# Altium PCB PCB1.PcbDoc
Units mil, origin at the board's own origin, x right, y up, seen from the top; angles counter-clockwise.
Board outline 1180 x 2215 mil, 2 copper layers (Top Layer, Bottom Layer); 40 components, 48 nets, 175 pads, 53 vias.
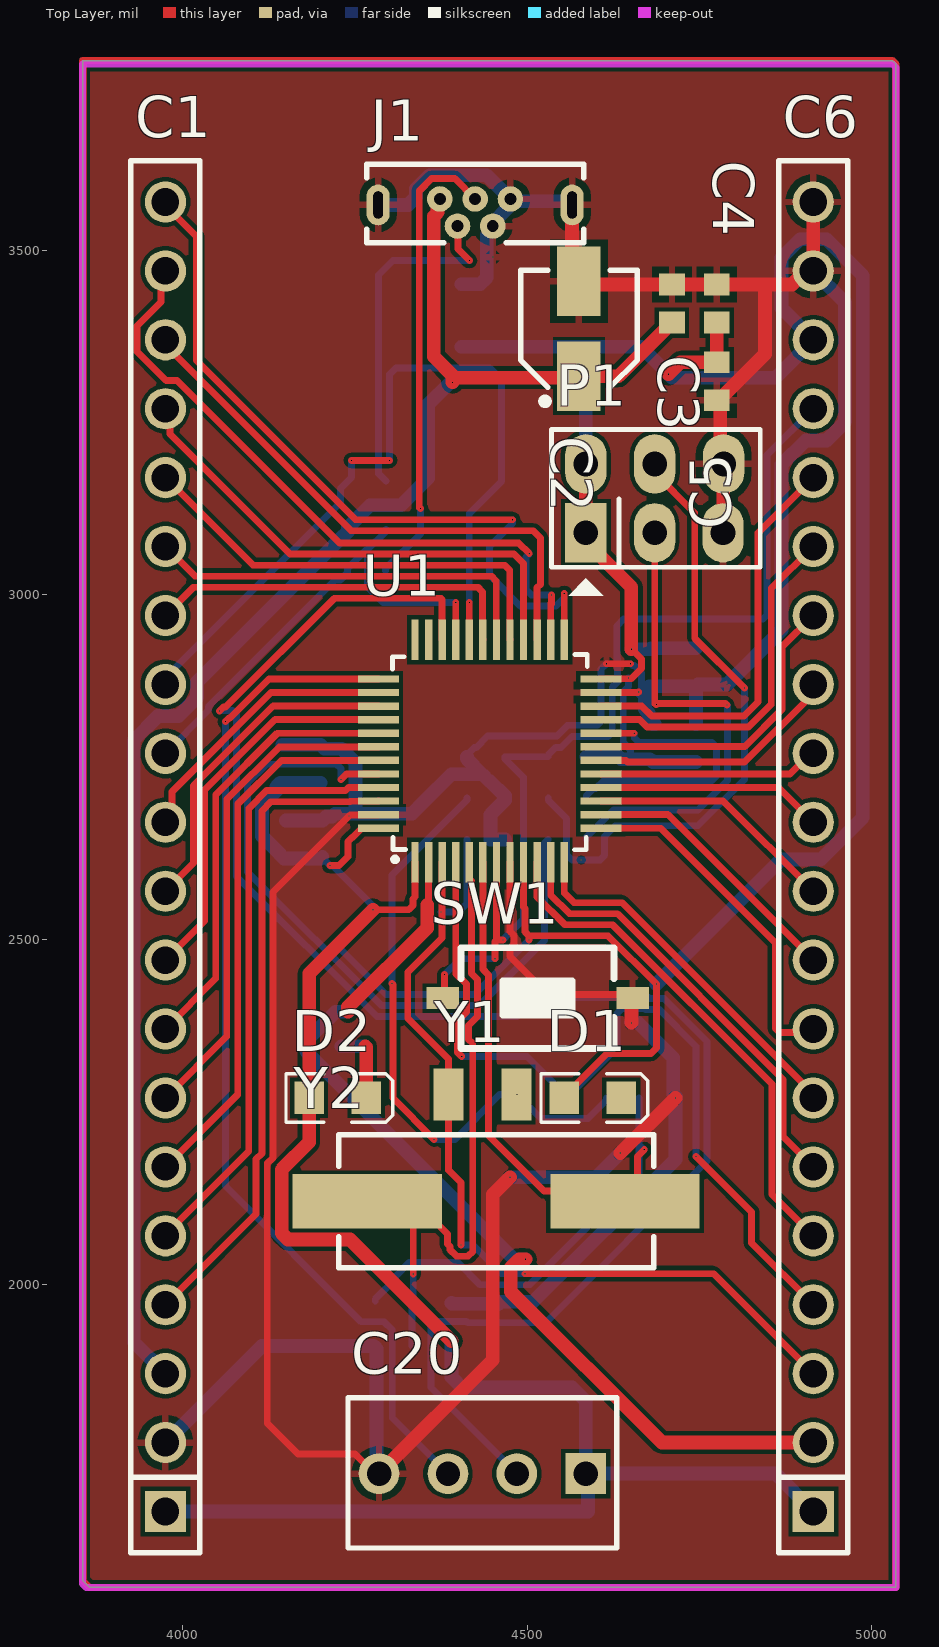
[diagram p0: Top Layer view]
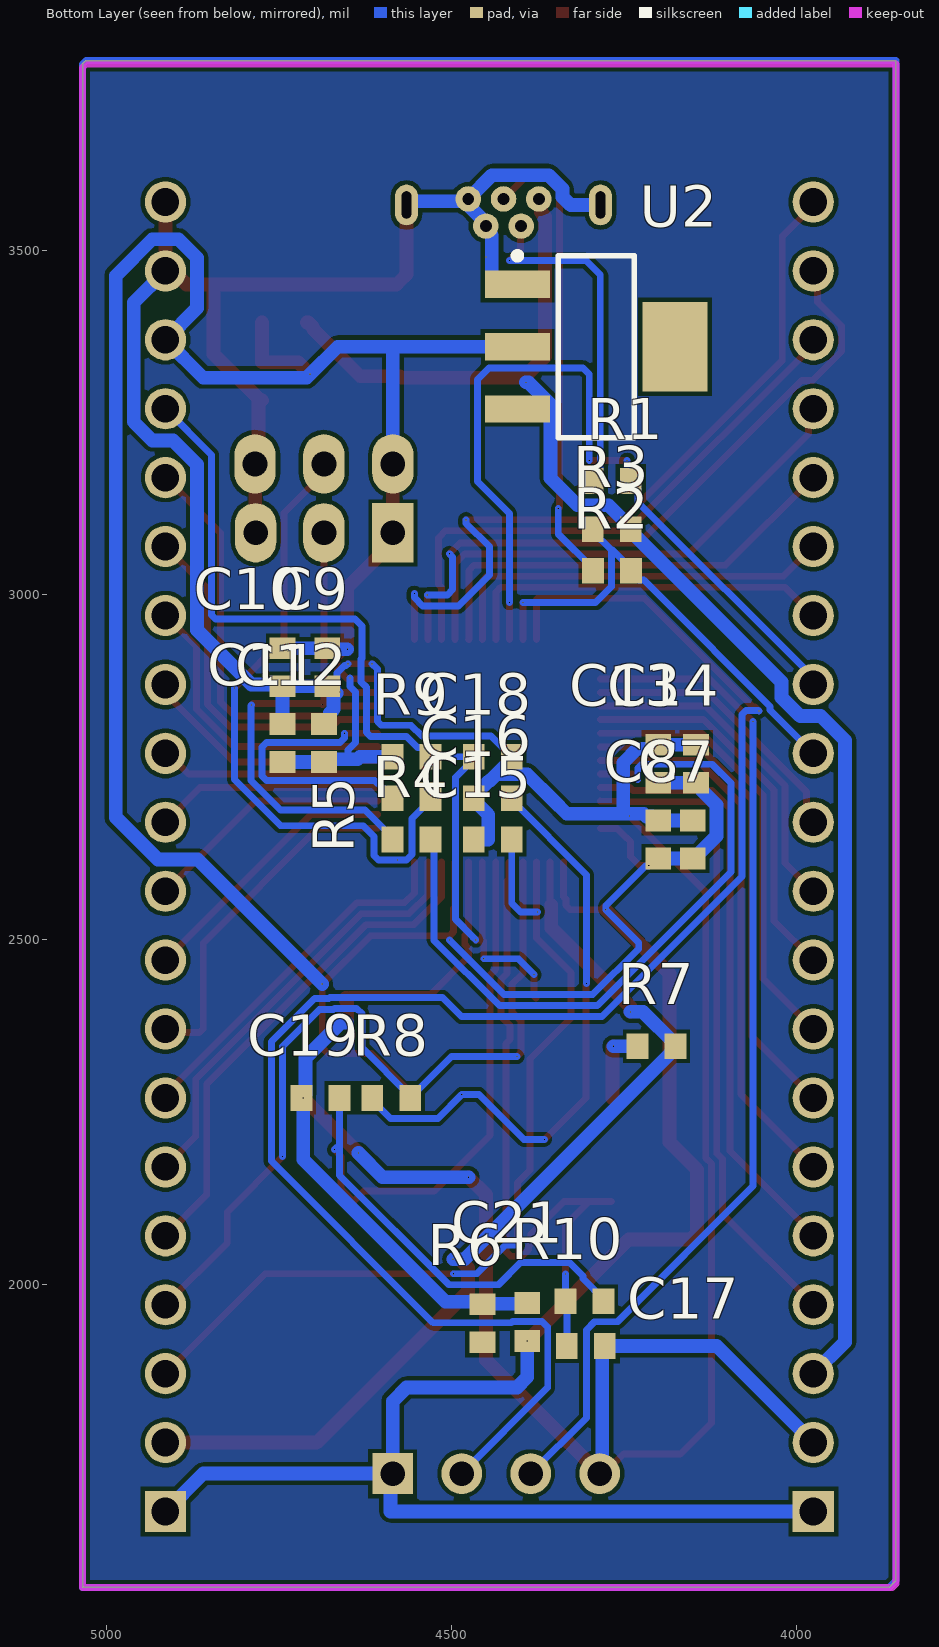
[diagram p1: Bottom Layer view, seen from below]
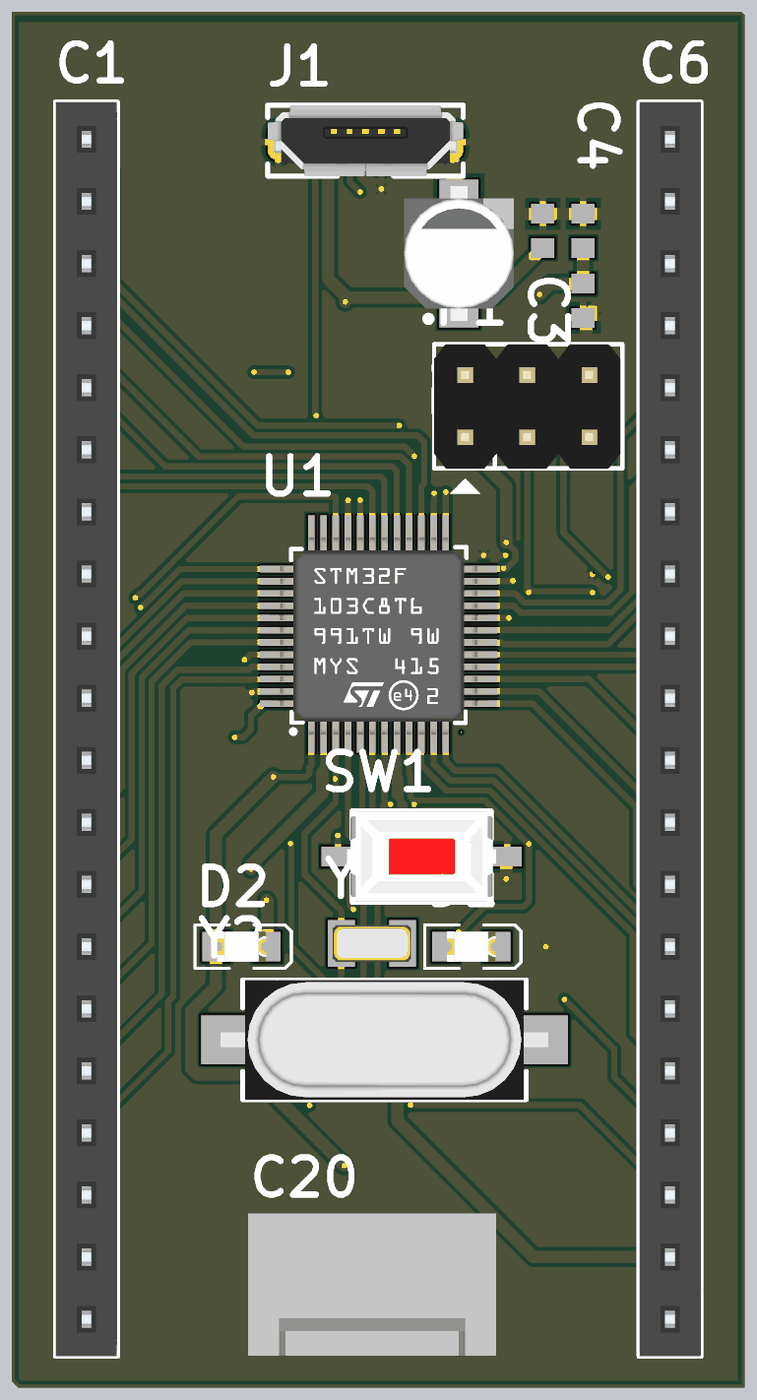
[diagram p2: 3D render of the assembled board from above, using the file's embedded part models]

## Layer stack, top to bottom
Top Solder: solder mask 0.4, Solder Resist, Dk 3.5
Top Layer: signal copper 1.4
Dielectric 1: dielectric 12.6, FR-4, Dk 4.8
Bottom Layer: signal copper 1.4
Bottom Solder: solder mask 0.4, Solder Resist, Dk 3.5

## Board outline
3855,1570 3865,1560 5035,1560 5035,3770 5030,3775 3855,3775

## Design rules (kind name [scope] priority, off if disabled: settings)
Clearance [All] p1: gap=6 ignorepadtopadclearanceinfootprint=FALSE
PolygonConnect [All] p1: connectstyle=Relief reliefconductorwidth=10 reliefentries=4 polygonreliefangle="90 Angle" airgapwidth=10
RoutingVias [All] p1: holewidth=0.4 width=0.8 viastyle="Through Hole" minholewidth=0.4 minwidth=0.8 maxholewidth=0.4 maxwidth=0.8
SolderMaskExpansion [All] p1: expansion=4 istentingtop=FALSE
Width [All] p1: maxlimit=20 minlimit=5 preferedwidth=10
30 further rules are at their usual default settings.

## Classes and differential pairs
component class Sheet1: C1 C2 C3 C4 C5 C6 C7 C12 C14 C15 C16 C17 C18 C19 C20 C21 D1 D2 J1 P1 R1 R2 R3 R4 R5 R6 R7 R8 R9 R10 SW1 U1 U2 Y1 Y2

## Components (designator, comment, footprint, x,y, rotation, side; value= is the part's Value field where it differs from the comment)
C1 "JP20" JP20-C1T 3975,1670 r90 top
C2 "Cap Pol SMD" "CAP ALU SIZE B" 4575,3386.1 r90 top value=470pF
C3 "Cap Non-Pol SMD" CAP-SM-0603 4710,3422.56 r90 top value=104
C4 "Cap Non-Pol SMD" CAP-SM-0603 4775,3422.56 r90 top value=100uF
C5 "Cap Non-Pol SMD" CAP-SM-0603 4775,3310 r270 top value=104
C6 "JP20" JP20-C1T 4915,1670 r90 top
C7 "Cap Non-Pol SMD" CAP-SM-0603 4150,2645 r270 bottom value=104
C8 "Cap Non-Pol SMD" CAP-SM-0603 4200,2645 r270 bottom value=4.7uF
C9 "Cap Non-Pol SMD" CAP-SM-0603 4680,2895 r90 bottom value=104
C10 "Cap Non-Pol SMD" CAP-SM-0603 4745,2895 r90 bottom value=4.7uF
C11 "Cap Non-Pol SMD" CAP-SM-0603 4745,2785 r270 bottom value=104
C12 "Cap Non-Pol SMD" CAP-SM-0603 4685,2785 r270 bottom value=4.7uF
C13 "Cap Non-Pol SMD" CAP-SM-0603 4200,2755 r270 bottom value=103
C14 "Cap Non-Pol SMD" CAP-SM-0603 4145,2755 r270 bottom value=4.7uF
C15 "Cap Non-Pol SMD" CAP-SM-0603 4440,2645 r0 bottom value=20pF
C16 "Cap Non-Pol SMD" CAP-SM-0603 4440,2705 r0 bottom value=20pF
C17 "Cap Non-Pol SMD" CAP-SM-0603 4305,1910 r180 bottom value=20pF
C18 "Cap Non-Pol SMD" CAP-SM-0603 4440,2765 r0 bottom value=105
C19 "Cap Non-Pol SMD" CAP-SM-0603 4690,2270 r0 bottom value=20pF
C20 "Header4" HDR4 4585,1725 r180 top
C21 "Cap Non-Pol SMD" CAP-SM-0603 4390,1945 r270 bottom value=104
D1 "LED SMD" LED_0805_Blue 4595,2270 r0 top
D2 "LED SMD" LED_0805_Blue 4225,2270 r0 top
J1 "614105150721" 614105150721 4424.42,3565.71 r0 top
P1 "Header 3X2" JP3x2 4685,3140 r0 top
R1 "RESISTOR SMD" RES-SM-0603 4294.44,3165 r180 bottom value=20R
R2 "RESISTOR SMD" RES-SM-0603 4294,3035 r180 bottom value=20R
R3 "RESISTOR SMD" RES-SM-0603 4294.44,3095 r180 bottom value=4.7k
R4 "RESISTOR SMD" RES-SM-0603 4585,2645 r180 bottom value=100k
R5 "RESISTOR SMD" RES-SM-0603 4585,2705 r180 bottom value=100k
R6 "RESISTOR SMD" RES-SM-0603 4455,1970 r270 bottom value=1K
R7 "RESISTOR SMD" RES-SM-0603 4175.44,2345 r0 bottom value=1K
R8 "RESISTOR SMD" RES-SM-0603 4560.44,2270 r0 bottom value=150k
R9 "RESISTOR SMD" RES-SM-0603 4585,2765 r180 bottom value=10k
R10 "RESISTOR SMD" RES-SM-0603 4280,1975 r0 bottom value=1M
SW1 "SW" SW1-SMD 4515,2415 r180 top value="SW chip 2 pin"
U1 "STM32F030C8T6" STM32F030C8T6 4338.19,2612.2 r0 top
U2 "LM1117-3.3V" SOT223 4290,3360 r270 bottom
Y1 "32.768kHz" WE-XTAL_CFPX-217 4435,2275 r0 top
Y2 "8MHz" WE-XTAL_HC49/4HSMX 4455,2120 r0 top

## Footprints (in the part's own frame and the unit in brackets; to place one, negate y for a bottom-side part, rotate by r counter-clockwise, add the part's x,y. Pads: shape width x height; smd on the part's side, far side on the other; paste and mask are expansions set on the pad)
614105150721 [mm] "Micro USB 2.0 Type B Vertical 5 Contacts"
  round 0.94 hole 0.44: 1(-1.3,0.22) 2(-0.65,-0.78) 3(0,0.22) 4(0.65,-0.78) 5(1.3,0.22)
  oval 0.85x1.5 hole 0.35 slot 1 at 90 deg: Shell(-3.575,0) Shell(3.575,0)
  silkscreen extent -4,-1.4 4,1.5, body extent -4,-1.4 4,1.5, height 5.64
"CAP ALU SIZE B" [mm] "Capacitor, Aluminium Electrolytric, 4.3mm L X 4.3mm W X 5.4mm H, IPC Medium Density"
  rect 2.55x1.6 smd: 1(-1.75,0) 2(1.75,0)
  silkscreen extent -2.8,-2.15 2.15,2.15, body extent -2.75,-2.25 2.75,2.25, height 5.7
CAP-SM-0603 [mm] "SMD Ceramic Capacitor Size 0603"
  rect 0.8x0.95 smd: 1(-0.7,0) 2(0.7,0)
  body extent -0.85,-0.45 0.85,0.45, height 0.6
HDR4 [mm] "Connector; Header; 4 Position"
  rect 1.5x1.5 hole 0.9: 1(0,0)
  round 1.5 hole 0.9: 2(2.54,0) 3(5.08,0) 4(7.62,0)
  silkscreen extent -1.14,-2.79 8.76,2.74, body extent -1.27,-2.92 8.89,2.88, height 11.72
JP3x2 [mil] "Connector 3x2"
  rect 60x86 hole 36: 1(-100,-50)
  oval 60x86 hole 36: 2(0,-50) 3(99,-50) 4(-100,50) 5(0,50) 6(100,50)
  silkscreen extent -150,-141 153,100, body extent -150,-100 150,100, height 335
JP20-C1T [mm] "20 row, straight, gold plating"
  rect 1.52x1.52 hole 1.02: 1(0,0)
  round 1.52 hole 1.02: 2(2.54,0) 3(5.08,0) 4(7.62,0) 5(10.16,0) 6(12.7,0) 7(15.24,0) 8(17.78,0) 9(20.32,0) 10(22.86,0) 11(25.4,0) 12(27.94,0) 13(30.48,0) 14(33.02,0) 15(35.56,0) 16(38.1,0) 17(40.64,0) 18(43.18,0) 19(45.72,0) 20(48.26,0)
  silkscreen extent -1.52,-1.27 49.78,1.27, body extent -1.52,-1.25 49.78,1.25, height 8.51
LED_0805_Blue [mm] "Chip LED, 2-Leads, Body 2.0x1.3mm, IPC Medium Density"
  rect 1.1x1.2 smd: 1(-1.05,0) 2(1.05,0)
  silkscreen extent -1.91,-0.89 2.03,0.89, body extent -1,-0.63 1,0.62, height 0.68
RES-SM-0603 [mm]
  rect 0.8x0.95 smd: 1(-0.014,0) 2(1.386,0)
  body extent -0.11,-0.4 1.49,0.4, height 0.3
SOT223 [mm]
  rect 1x2.4 smd: 1(-2.3,-2.9) 2(0,-2.9) 3(2.3,-2.9)
  rect 3.3x2.4 smd: 4(0,2.9)
  silkscreen extent -3.47,-3.03 3.35,1.4, body extent -3.25,-3.56 3.25,3.4, height 1.68
STM32F030C8T6 [mm] "CQFP, 148-Leads, Body 33.75x33.75mm, Pitch 0.64mm, IPC Medium Density"
  rect 0.27x1.5 smd: 1(-0.025,-0.001) 2(0.475,-0.001) 3(0.975,-0.001) 4(1.475,-0.001) 5(1.975,-0.001) 6(2.475,-0.001) 7(2.975,-0.001) 8(3.475,-0.001) 9(3.975,-0.001) 10(4.475,-0.001) 11(4.975,-0.001) 12(5.475,-0.001) 25(5.475,8.199) 26(4.975,8.199) 27(4.475,8.199) 28(3.975,8.199) 29(3.475,8.199) 30(2.975,8.199) 31(2.475,8.199) 32(1.975,8.199) 33(1.475,8.199) 34(0.975,8.199) 35(0.475,8.199) 36(-0.025,8.199)
  rect 1.5x0.27 smd: 13(6.825,1.249) 14(6.825,1.749) 15(6.825,2.249) 16(6.825,2.749) 17(6.825,3.249) 18(6.825,3.749) 19(6.825,4.249) 20(6.825,4.749) 21(6.825,5.249) 22(6.825,5.749) 23(6.825,6.249) 24(6.825,6.749) 37(-1.375,6.749) 38(-1.375,6.249) 39(-1.375,5.749) 40(-1.375,5.249) 41(-1.375,4.749) 42(-1.375,4.249) 43(-1.375,3.749) 44(-1.375,3.249) 45(-1.375,2.749) 46(-1.375,2.249) 47(-1.375,1.749) 48(-1.375,1.249)
  silkscreen extent -0.85,0.05 6.32,7.65, body extent -1.77,-0.49 7.23,8.51, height 1.55
SW1-SMD [mm]
  rect 1.2x0.8 smd: 1(-3.5,0) 2(3.5,0)
  silkscreen extent -2.82,-1.85 2.82,1.85, body extent -3.05,-1.85 3.05,1.85, height 2.5
WE-XTAL_CFPX-217 [mm] "Quartz Crystal, size CFPX-217, body 3.2x1.5mm"
  rect 1.1x1.9 smd: 1(-1.25,0) 2(1.25,0)
  body extent -1.6,-0.75 1.6,0.75, height 0.75
WE-XTAL_HC49/4HSMX [mm] "Quartz Crystal, size HC49/4HSMX, body 11.4x4.9mm"
  rect 5.5x2 smd: 1(-4.75,0) 2(4.75,0)
  silkscreen extent -5.8,-2.45 5.8,2.45, body extent -6.7,-2.45 6.7,2.45, height 4.3

## Part data
C1 C6: "WR-PHD 2.54 mm Angled Socket Header", Manufacturer="W¨¹rth Elektronik eiSos GmbH", partNo=613020143121, ComponentLink1 Description=Manufacturer, ComponentLink1URL=http://www.we-online.com, ComponentLink2 Description=Datasheet, ComponentLink2URL=http://katalog.we-online.de/em/datasheet/6130xx143121.pdf, Created by="Karrer Zheng", Created Date="29 March 2013", NoPins=20
C2: "Polarized Capacitor (Radial)"
C3 C4 C5 C7 C8 C9 C10 C11 C12 C13 C14 C15 C16 C17 C18 C19 C21: "Capacitor"
C20: "Header IDC, 4 x 1 Pin Vertical 2.54mm Pitch (Non-Boxed, Male)", Manufacturer="W¨¹rth Elektronik eiSos GmbH", partNo=613002143121, ComponentLink1 Description=Manufacturer, ComponentLink1URL=http://www.we-online.com, ComponentLink2 Description=Datasheet, ComponentLink2URL=http://katalog.we-online.de/em/datasheet/6130xx143121.pdf, Created by="Karrer Zheng", Created Date="29 March 2013", NoPins=02
D1 D2: "LED"
J1: "Micro USB 2.0 Type B Receptacle WR-COM, Vertical, THT", Contact Resistance="30 mOhm", Operating Temperature="-40 to 85 degC", Rated Current="1.8 A", Working Voltage="30 VAC", ComponentLink1Description=Manufacturer, ComponentLink1URL=http://www.we-online.de, ComponentLink2Description=Datasheet, ComponentLink2URL=https://katalog.we-online.de/em/datasheet/614105150721.pdf, Connector Type="Micro USB 2.0 Type B", Gender=Receptacle, Mounting Technology=THT, Orientation=Vertical, Packaging="Tape and Reel", Part Number=614105150721, Published Date="September 2018", Publisher="Wurth Elektronik"
P1: "Header, 3-Pin, Dual row", LatestRevisionDate=17-Jul-2002, LatestRevisionNote="Re-released for DXP Platform.", Publisher="Altium Limited"
R1 R2 R3 R4 R5 R6 R7 R8 R9 R10: "Resistor"
SW1: library part SW2, "Switch button 2 pin"
U1: "ARM® Cortex®-M0 series Microcontroller IC 32-Bit Single-Core 48MHz 64KB (64K x 8) FLASH 48-LQFP (7x7)", Mfr=STMicroelectronics, Operating Temperature="-40°C ~ 85°C (TA)", Supplier Device Package="48-LQFP (7x7)", Voltage - Supply (Vcc/Vdd)="2.4V ~ 3.6V", ComponentLink1Description=Digikey, ComponentLink1URL=https://www.digikey.com/en/products/detail/stmicroelectronics/STM32F030C8T6/4357252, Connectivity="I²C, SPI, UART/USART", Core Processor="ARM® Cortex®-M0", Core Size="32-Bit Single-Core", Data Converters="A/D 12x12b", Mounting Type="Surface Mount", Number of I/O=39, Oscillator Type=Internal, Peripherals="DMA, POR, PWM, WDT", Program Memory Size="64KB (64K x 8)", Program Memory Type=FLASH, RAM Size="8K x 8", Speed=48MHz
U2: library part LM1117, "800mA Low-Dropout Linear Regulator", Creator="Nguyen Ba Bien", Website=http://group3i.net
Y1: library part 830009706, "WE-XTAL Watch Crystal, SMT, CFPX-217, 32.768kHz, +/-20ppm", Frequency Stability=-, Frequency Tolerance=+/-20ppm, Load Capacitance=9pF, Manufacturer="Wurth Elektronik", Operating Temperature="-40 to +85degC", ComponentLink1Description=Manufacturer, ComponentLink1URL=http://www.we-online.de, ComponentLink2Description=Datasheet, ComponentLink2URL=https://katalog.we-online.com/pbs/datasheet/830009706.pdf, Frequency=32.768kHz, Manufacturer Part Number=830009706, Mounting Technology=SMT, Packaging="Tape and Reel", Published Date="July 2020", Size=CFPX-217
Y2: library part 830003151, "WE-XTAL Quartz Crystal, SMT, HC49/4HSMX, 8MHz, +/-30ppm", Frequency Stability=+/-50ppm, Frequency Tolerance=+/-30ppm, Load Capacitance=16pF, Manufacturer="Wurth Elektronik", Operating Temperature="-10 to +60degC", ComponentLink1Description=Manufacturer, ComponentLink1URL=http://www.we-online.de, ComponentLink2Description=Datasheet, ComponentLink2URL=https://katalog.we-online.com/pbs/datasheet/830003151.pdf, Frequency=8MHz, Manufacturer Part Number=830003151, Mounting Technology=SMT, Packaging="Tape and Reel", Published Date="July 2020", Size=HC49/4HSMX

## Via types
v1: diameter 0.8, hole 0.4, Top Layer to Bottom Layer, 53 vias

## Nets (pads, with @x,y where several pads share a name; then routed paths per layer and width w, separated by ;. In a path a pad name is that pad's centre, name@x,y a point inside that pad or via, vN(x,y) a via of type N, cw(c..) or ccw(c..) an arc to the next point about the centre after c; other vN are vias at no path point)
3.3: C1.1 C4.1 C5.1 C6.1 C6.18 C7.2 C8.2 C9.2 C10.2 C11.2 C12.2 C13.2 C14.2 C20.1 C21.2 D1.1 D2.1 P1.1 P1.4 R9.1 U1.1 U1.9 U1.24 U1.48 U2.2 | length 6926.4
  Top Layer w10: v1(4213.7,2607.08) 4227.08,2607.08 4240,2620 4240,2642.31 4245.86,2648.16 4246.63,2648.16 4259.53,2661.06 4283.74,2661.06 U1.48 ; v1(4276.15,2543.15) 4328.14,2543.15 4334,2549.01 4334,2558.7 4337.2,2561.9 U1.1 ; U1.9 4494.69,2547.29 4496.83,2545.14 4496.83,2511.17 4502.69,2505.32 ; v1(4502.69,2498.94) 4502.69,2505.32 ; D1.1 4553.66,2271.97 4616,2334.31 4679.31,2334.31 4687.42,2342.42 v1(4687.42,2435.3) 4617.41,2505.32 4502.69,2505.32 ; U1.24 4607.2,2878.23 4650.86,2878.23 4666,2893.37 4666,2906.63 4656.63,2916 4656.02,2916 v1(4651.05,2920.97)
  Top Layer w20: v1(4276.15,2543.15) 4183.66,2450.66 D2.1 4183.66,2205.93 4143.72,2166 4143.72,2074 4153.1,2064.63 4242.81,2064.63 v1(4390,1917.44) ; P1.4 P1.1 4585,3077 4651.05,3010.95 v1(4651.05,2920.97) ; v1(4705,3320) 4722.56,3337.56 C5.1 C4.1
  Bottom Layer w10: C8.2@4202.56,2620 4202.56,2618.22 v1(4213.7,2607.08) 4213.7,2606.69 4218.31,2606.69 4276.15,2548.85 v1(4276.15,2543.15) 4228.14,2495.14 4228.14,2486.86 4295,2420 4423.75,2420 v1(4502.69,2498.94) ; v1(4647,2879.5) 4647,2866.99 4639.3,2859.29 4639.3,2785.63 4650,2774.93 4650,2768.69 4657.09,2761.6
  Bottom Layer w20: C1.1 4588.28,1670 4588.28,1721.72 C20.1 ; C13.2 C14.2 4142.05,2727.44 4136.3,2721.69 4136.3,2715.93 4115.3,2694.93 4115.3,2650.18 4141.3,2624.18 4141.3,2623.19 4147.05,2617.44 C7.2 C8.2 C8.2@4202.56,2620 ; v1(4390,1917.44) 4390,1865 4405,1850 4565,1850 4585,1830 C20.1 ; U2.2 4585,3360 ; P1.4 4585,3360 ; R9.1 4632.9,2765 4636.3,2761.6 4657.09,2761.6 4677.89,2761.6 4682.05,2757.44 C12.2 C11.2 ; v1(4651.05,2920.97) 4678.41,2920.97 C9.2 C10.2 ; v1(4687.42,2435.3) 4868.03,2615.92 4925.86,2615.92 4986.92,2676.98 4986.92,3463.02 4934.02,3515.92 4895.98,3515.92 4869.08,3489.02 4869.08,3415.92 C6.18 4860,3315 4710,3315 v1(4705,3320) 4665,3360 4585,3360 ; C6.1 4860,1725 C20.1
+5: C1.3 C2.1 C3.1 J1.1 R3.2 U2.3 | length 2326.2
  Top Layer w20: J1.1 4369.97,3571.12 4369.97,3554.95 4364.31,3549.29 4364.31,3345.69 4391.73,3318.27 v1(4391.73,3308.31) ; 4395,3315 4572.8,3315 C2.1 4632.2,3317.2 4701.3,3386.3 4701.3,3389.25 4707.05,3395 C3.1
  Bottom Layer w20: C1.3 3929.08,1915.92 3929.08,2789.02 3964.14,2824.08 3994.02,2824.08 4020.92,2850.98 4020.92,2873.56 4233.66,3086.3 4234.13,3086.3 4239.88,3092.05 4239.88,3097.95 4271.93,3130 4317.08,3130 4356.19,3169.11 4356.19,3276.19 4388.31,3308.31 v1(4391.73,3308.31)
BOOT0: R4.2 U1.44 | length 1050.7
  Top Layer w10: v1(4229.7,2731.83) 4237.99,2740.12 U1.44
  Bottom Layer w10: v1(4229.7,2731.83) 4229.7,2747.75 4223.26,2754.19 4121.74,2754.19 4094.3,2726.75 4094.3,2598.07 4288.37,2404 4430.38,2404 4525,2498.62 4525,2639.56 R4.2
BOOT1: R5.1 U1.20 | length 426.3
  Top Layer w10: U1.20 v1(4655.3,2799.17)
  Bottom Layer w10: R5.1 4585.56,2707.95 4596.31,2718.7 4599.26,2718.7 4611.25,2730.69 4745.63,2730.69 4768.26,2730.69 4774.7,2737.14 4774.7,2779.14 4768.14,2785.7 4661.86,2785.7 4655.3,2792.25 v1(4655.3,2799.17)
GND: C1.2 C2.2 C3.2 C4.2 C5.2 C6.19 C6.20 C7.1 C8.1 C9.1 C10.1 C11.1 C12.1 C13.1 C14.1 C15.2 C16.2 C17.2 C18.1 C19.2 C20.4 C21.1 J1.4 J1.5 J1.Shell P1.3 P1.6 R6.1 SW1.1 U1.8 U1.23 U1.47 U2.1 | length 7073.8
  Top Layer w10: U1.47 4283.74,2680.75 4243.22,2680.75 v1(4241.4,2678.93) 4131,2568.53 4131,2182.97 4122.72,2174.7 4122.72,1798.13 4167.6,1753.26 4250.29,1753.26 4278.55,1725 C20.4 ; U1.8 4475,2511.55 4480.63,2505.92 4480.63,2492.67 4475,2487.04 4475,2475 4530,2420 4647.8,2420 SW1.1 ; U1.23 4660.84,2858.23 v1(4661.85,2859.24) ; v1(4615,2900) v1(4650,2900)
  Top Layer w20: C20.4 4450,1890 4450,2130 v1(4475,2155) ; J1.Shell@4565.16,3565.71 4565.16,3464.84 C2.2 4579.88,3450.12 C3.2 C4.2 4845,3450.12 ; v1(4635,2190) v1(4715,2270) ; v1(4651.13,2379) 4651.13,2409.25 4652.8,2410.91 SW1.1 ; P1.3 4784.5,3090.5 4784.5,3189.5 P1.6 4780,3195 4780,3277.44 C5.2 4777.95,3282.44 4845,3349.49 4845,3450.12 ; C6.20 C6.19 4904.22,3470 4884.34,3450.12 4845,3450.12
  Bottom Layer w10: 4221,2677.3 4239.77,2677.3 v1(4241.4,2678.93) ; C18.1 4412.44,2767.95 4423.19,2778.7 4426.14,2778.7 4442.44,2795 4542.93,2795 4558.63,2810.7 4601.44,2810.7 4607.3,2816.56 4607.3,2892.3 v1(4615,2900) ; v1(4650,2900) 4652.76,2897.21 4655.34,2897.21 4666,2886.55 C9.1@4666,2863.36 ; v1(4661.85,2859.24) C9.1@4665.97,2863.36
  Bottom Layer w20: C1.2 4115,1910 C17.2 4281.22,1906.22 4281.22,1728.78 C20.4 ; C14.1 C13.1 4205.75,2776.81 4230.33,2776.81 4250.7,2756.44 4250.7,2683 4250,2682.3 ; C7.1 C8.1 4202.95,2672.56 4208.7,2678.31 4217.01,2678.31 4221,2682.3 4250,2682.3 ; J1.Shell@4283.66,3565.71 4327.01,3565.71 4338.72,3577.42 4338.72,3588.66 4358.94,3608.87 4441.09,3608.87 J1.5 ; C21.1 4391,1971.56 4458.95,1971.56 4461.7,1974.3 4508.63,1974.3 4715,2180.67 C19.2@4715,2267.44 ; U2.1 4431.73,3450.55 4441.42,3460.24 4441.42,3521.82 4450,3530.4 J1.4 4450,3539.6 4472.34,3561.94 4472.34,3571.12 J1.5 ; C18.1 4412.44,2762.05 4434.79,2739.7 ; C15.2 4446.56,2645 4446.56,2681.05 4467.56,2702.05 4467.56,2707.95 4445.21,2730.3 4444.22,2730.3 4434.82,2739.7 ; v1(4475,2155) 4600,2155 v1(4635,2190) ; J1.Shell@4565.16,3565.71 4559.75,3571.12 4478.84,3571.12 J1.5 ; v1(4651.13,2379) 4661,2379 4711.81,2328.19 4711.81,2275.75 C19.2@4716.28,2271.28 ; C9.1@4666.85,2857.15 C9.1@4671,2857.15 ; C12.1 4682.05,2812.56 4676.3,2818.31 4676.3,2828.6 4671,2833.9 4671,2861.29 4677.15,2867.44 C10.1 ; C11.1 C10.1 ; C6.19 4960.92,3424.08 4960.92,3250.98 4934.02,3224.08 4904.14,3224.08 4869.08,3189.02 4869.08,2949.08 v1(4790,2870) 4747.56,2870 C10.1 ; 4250,2682.3 4332.66,2682.3 4351.89,2701.53 4390.07,2739.7 4434.79,2739.7
  other v1: 4450,3490
NetC16_1: C16.1 R8.2 Y1.2 | length 870.6
  Top Layer w10: v1(4303.91,2436) 4305,2434.91 4305,2270 v1(4365,2210)
  Bottom Layer w10: v1(4303.91,2436) 4303.91,2593.52 4412.44,2702.05 C16.1 ; v1(4365,2210) 4395,2210 4460,2275 v1(4485,2275) 4519.7,2240.3 4588.25,2240.3 4615,2267.05 R8.2
NetD2_2: D2.2 R7.2 | length 110.6
  Top Layer w20: v1(4265,2345) 4266.34,2343.66 D2.2
  Bottom Layer w20: R7.2 v1(4265,2345)
NetJ1_2: J1.2 R1.1 | length 501.4
  Top Layer w10: J1.2 4399.5,3534.31 4399.5,3501.5 v1(4416,3485)
  Bottom Layer w10: R1.1 4284.25,3175.75 4284.25,3188.12 4284,3188.37 4284,3464 4305,3485 v1(4416,3485)
NetJ1_3: J1.3 R2.1 | length 673.4
  Top Layer w10: v1(4345,3125) 4343.31,3126.69 4343.31,3586.18 4361.01,3603.87 4394.91,3603.87 J1.3
  Bottom Layer w10: R2.1 4294.56,3037.95 4345,3088.39 v1(4345,3125)
NetP1_2: P1.2 R4.1 | length 708.8
  Top Layer w10: P1.2 4685,2842.3 ; v1(4687.4,2840.69) 4686.61,2840.69 4685,2842.3 ; v1(4790,2840) 4787.7,2842.3 4685,2842.3
  Bottom Layer w10: R4.1 4585.56,2647.95 4625.36,2687.75 4747.95,2687.75 4790.7,2730.51 4790.7,2839.3 v1(4790,2840)
NetP1_5: P1.5 R5.2 | length 930.1
  Top Layer w10: P1.5 4685,3177 4743,3119 4743,2937 v1(4815,2865)
  Bottom Layer w10: R5.2 4530.44,2702.05 4557.19,2675.3 4557.19,2623.36 4565.25,2615.3 v1(4578.36,2615.3) 4605.86,2615.3 4612.31,2621.74 4612.31,2649.24 4628.07,2665 4747.82,2665 4815,2732.18 v1(4815,2865)
NRST: C6.17 C18.2 R9.2 SW1.2 U1.7 | length 1440
  Top Layer w10: SW1.2 4380,2417.8 v1(4380,2449) ; v1(4453.06,2471.94) 4453.06,2497.04 4455.31,2499.3 U1.7 ; 4455.31,2501.64 4457.66,2499.3 v1(4464.63,2499.3)
  Bottom Layer w10: v1(4380,2449) 4402.94,2471.94 v1(4453.06,2471.94) ; v1(4464.63,2499.3) 4469.23,2503.9 4469.23,2504.23 4494.31,2529.31 4494.31,2735.3 4467.56,2762.05 C18.2 R9.2 4530.44,2767.95 4541.19,2778.7 4549.25,2778.7 4565.25,2794.7 4617.44,2794.7 4623.3,2800.56 4623.3,2865.92 4631,2873.62 4631,2906.63 4630,2907.63 4630,2955 4640,2965 4842.22,2965 4848.08,2970.86 4848.08,3203.08 C6.17
PA0: C6.5 U1.10 | length 748.7
  Top Layer w10: U1.10 4514.37,2561.75 4554.81,2521.32 4624.03,2521.32 4855,2290.35 4855,2130 C6.5
PA1: C6.6 U1.11 | length 640.5
  Top Layer w10: U1.11 4534.06,2564.7 4561.44,2537.32 4630.66,2537.32 4871,2296.98 4871,2214 C6.6
PA2: C6.7 U1.12 | length 532.4
  Top Layer w10: U1.12 4553.74,2567.64 4568.06,2553.32 4637.29,2553.32 4915,2275.6 C6.7
PA3: C6.8 U1.13 | length 505.7
  Top Layer w10: U1.13 4693.62,2661.38 4860,2495 4860,2370.86 4865.86,2365 4910,2365 C6.8
PA4: C6.9 U1.14 | length 395.5
  Top Layer w10: U1.14 4703.94,2681.06 C6.9
PA5: C6.10 U1.15 | length 362.3
  Top Layer w10: U1.15 4784.25,2700.75 C6.10
PA6: C6.11 U1.16 | length 329
  Top Layer w10: U1.16 4864.57,2720.43 C6.11
PA7: C6.12 U1.17 | length 320.5
  Top Layer w10: U1.17 4881.35,2740.12 4911.24,2770 C6.12
PA8: C1.16 U1.29 | length 655.9
  Top Layer w10: C1.16 4102,3043 4467,3043 4474.69,3035.32 4474.69,2935.32 U1.29
PA9: C1.15 U1.30 | length 585.9
  Top Layer w10: C1.15 4018,3027 4448.14,3027 4455,3020.14 4455,2935.32 U1.30
PA10: C1.14 U1.31 | length 549.4
  Top Layer w10: C1.14 4016,3011 4428.46,3011 4435.31,3004.14 4435.31,2935.32 U1.31
PA11: C1.13 R1.2 U1.32 | length 1186.9
  Top Layer w10: v1(4245,3195) v1(4300,3195) ; U1.32 v1(4415.94,2989.06)
  Bottom Layer w10: C1.13 3975,2880.12 4229.13,3134.26 4229.13,3154.25 R1.2 4245,3170.12 v1(4245,3195) ; v1(4300,3195) 4300,3320 4309.31,3329.31 4445.69,3329.31 4462.42,3312.58 4462.42,3164.61 4415.94,3118.14 v1(4415.94,2989.06)
PA12: C1.12 R2.2 R3.1 U1.33 | length 707.8
  Top Layer w10: U1.33 v1(4396.26,2988.74)
  Bottom Layer w10: C1.12 4037.74,2832.74 4037.74,2838.12 4201.26,3001.65 4220.92,3021.3 4228.69,3021.3 4239.44,3032.05 4239.44,3037.95 4266.35,3064.86 4267.81,3064.86 ; R3.1 4295,3092.05 4267.81,3064.86 ; v1(4396.26,2988.74) 4290.81,2988.74 4267.81,3011.74 4267.81,3064.86
PA15: C1.11 U1.38 | length 407.4
  Top Layer w10: C1.11 3984.54,2679.54 3984.54,2714.28 4128.48,2858.23 U1.38
PB0: C6.13 U1.18 | length 363.5
  Top Layer w10: U1.18 4607.2,2759.49 4643.08,2759.49 4645.28,2757.29 4815.46,2757.29 4915,2856.83 C6.13
PB1: C6.14 U1.19 | length 440.1
  Top Layer w10: U1.19 4607.2,2779.8 4644.99,2779.8 4645.28,2780.09 4815.63,2780.09 4870,2834.46 4870,2925 C6.14
PB3: C1.10 U1.39 | length 486
  Top Layer w10: C1.10 4015.92,2610.92 4015.92,2723.04 4131.43,2838.54 U1.39
PB4: C1.9 U1.40 | length 564.6
  Top Layer w10: C1.9 4032,2527 4032,2716.49 4134.37,2818.86 U1.40
PB5: C1.8 U1.41 | length 643.1
  Top Layer w10: C1.8 4048,2443 4048,2709.86 4137.31,2799.17 U1.41
PB6: C1.7 U1.42 | length 721.7
  Top Layer w10: C1.7 4064,2359 4064,2703.24 4140.25,2779.49 U1.42
PB7: C1.6 U1.43 | length 800.3
  Top Layer w10: C1.6 4080,2275 4080,2696.61 4143.2,2759.8 U1.43
PB8: C1.5 U1.45 | length 870.8
  Top Layer w10: C1.5 3975,2072.23 4096,2193.23 4096,2689.98 4121.85,2715.83 4236.33,2715.83 4240.93,2720.43 U1.45
PB9: C1.4 U1.46 | length 949.4
  Top Layer w10: C1.4 4106.72,2101.72 4106.72,2181.32 4115,2189.6 4115,2686.35 4128.48,2699.83 4242.96,2699.83 4243.56,2700.43 4283.74,2700.43 U1.46
PB10: C6.15 U1.21 | length 519.5
  Top Layer w10: U1.21 4663.19,2818.86 4674.05,2808 4820.91,2808 4854,2841.09 4854,3009 C6.15
PB11: C6.16 U1.22 | length 601.1
  Top Layer w10: U1.22 4666.13,2838.54 4680.67,2824 4814.28,2824 4835,2844.72 4835,3090 C6.16
PB12: C1.20 U1.25 | length 1102.6
  Top Layer w10: C1.20 3975,3565 4020,3520 4020,3340 4251,3109 v1(4478.81,3109) ; U1.25 v1(4553.74,3002.06)
  Bottom Layer w10: v1(4478.81,3109) 4478.81,3103.81 4445,3070 4445,3028.82 4489.82,2984 4541.63,2984 4553.74,2996.11 v1(4553.74,3002.06)
PB13: C1.19 U1.26 | length 985.4
  Top Layer w10: C1.19 3968.86,3463.86 3968.86,3425.08 3934.08,3390.3 3934.08,3353.05 3976.21,3310.92 3991.95,3310.92 4227.87,3075 4487.63,3075 v1(4502.97,3059.66) ; U1.26 4534.06,2987.76 4535,2986.81 v1(4535,3000)
  Bottom Layer w10: v1(4502.97,3059.66) 4502.97,3059.6 4498.37,3055 4498.37,3007.49 4505.86,3000 v1(4535,3000)
PB14: C1.18 U1.27 | length 817
  Top Layer w10: C1.18 3975,3362.37 4244.37,3093 4508.51,3093 4518.97,3082.54 4518.97,3015.21 4514.37,3010.61 U1.27
PB15: C1.17 U1.28 | length 740.6
  Top Layer w10: C1.17 3981.76,3263.24 3981.76,3233.24 4156,3059 4481,3059 4494.69,3045.32 U1.28
PC13: C6.2 R7.1 U1.2 | length 1396.3
  Top Layer w10: 4355,2550 4356.89,2551.89 U1.2
  Top Layer w20: v1(4240,2395) 4240,2401.79 4355,2516.79 4355,2550 ; v1(4497.47,2036) 4488.3,2036 4476,2023.7 4476,1989.3 4695.3,1770 C6.2
  Bottom Layer w20: v1(4240,2395) 4221.93,2395 4174.88,2347.95 R7.1 4180.63,2339.25 4180.63,2336.3 4480.93,2036 v1(4497.47,2036)
PC14: C6.3 C15.1 U1.3 Y1.1 | length 1331.9
  Top Layer w10: U1.3 4376.57,2501.88 4326.58,2451.88 4326.58,2385.79 4385.79,2326.59 4385.79,2211.84 4386,2211.63 4386,2165.19 4404,2147.19 v1(4404,2056.4) ; v1(4497,2015) 4770,2015 C6.3
  Bottom Layer w10: v1(4375,2540) 4400,2540 4412.44,2552.44 C15.1 ; v1(4404,2056.4) 4421.3,2056.4 4462.7,2015 v1(4497,2015)
PC15: C6.4 R8.1 U1.4 | length 1212.7
  Top Layer w10: U1.4 4396.26,2450.87 4411.83,2435.3 4411.83,2394.7 4399,2381.87 4399,2336 v1(4405,2330) ; v1(4745,2185) 4825.23,2104.77 4825.23,2059.77 C6.4
  Bottom Layer w10: v1(4405,2330) 4499.88,2330 4546.18,2283.7 4549.13,2283.7 R8.1@4559.88,2272.95 ; R8.1 R8.1@4559.88,2272.95 ; v1(4745,2185) 4745,2345 4691.7,2398.3 4671.39,2398.3 4669.7,2400 4637.55,2400 4630,2392.45 4630,2343.07 R8.1@4559.88,2272.95
PF0: C17.1 R10.2 U1.5 Y2.1 | length 1002.7
  Top Layer w10: Y2.1 Y2.1@4300.19,2120 ; v1(4334.56,2014.56) 4334.56,2085.63 Y2.1@4300.19,2120 ; U1.5 4416.26,2611.85 4416.26,2587.64 4419.31,2584.58 4419.31,2450.44 4427.83,2441.93 4427.83,2388.07 4415,2375.24 4415,2355 4421,2349 4421,2047.26 4414.14,2040.4 4397.37,2040.4 4388,2049.77 4388,2054.37 4384.39,2057.98 4384.39,2072.5 4336.89,2120 Y2.1@4300.19,2120
  Bottom Layer w10: C17.1 4332.56,1973 R10.2 v1(4334.56,2014.56)
PF1: C19.1 R10.1 U1.6 Y2.2 | length 1334.6
  Top Layer w10: U1.6 4435.63,2456.76 4443.83,2448.56 4443.83,2215.87 4524.6,2135.1 4626.91,2135.1 Y2.2 4660,2137.99 4660,2185.3 v1(4669.85,2195.15)
  Bottom Layer w10: R10.1 4279.44,1977.95 4309.28,2007.79 4309.28,2011.91 4328.37,2031 4399.56,2031 4431.56,1999 4503.63,1999 4662.44,2157.81 4662.44,2198.4 ; C19.1 4662.44,2206.13 4662.44,2198.4 ; v1(4669.85,2195.15) 4666.6,2198.4 4662.44,2198.4
SWC: C20.3 U1.37 | length 1491.4
  Top Layer w10: v1(4062.3,2815.99) 4067.54,2821.24 4068.86,2821.24 4125.54,2877.91 U1.37
  Bottom Layer w10: v1(4062.3,2815.99) 4062.3,2142.14 4259.14,1945.3 4292.15,1945.3 4304.19,1933.26 4304.19,1805.81 C20.3
SWD: C20.2 U1.34 | length 2456.8
  Top Layer w10: v1(4053.74,2831.49) 4059.48,2837.24 4062.24,2837.24 4220,2995 4375,2995 4376.57,2993.43 U1.34
  Bottom Layer w10: v1(4053.74,2831.49) 4054.48,2832.24 4072.44,2832.24 4078.3,2826.38 4078.3,2591.45 4281.75,2388 4485.19,2388 4513.19,2416 4676.33,2416 4678.02,2414.3 4698.32,2414.3 4761,2351.63 4761,2178.37 4526.44,1943.81 4413.64,1943.81 4411.64,1945.81 4368.36,1945.81 4360.3,1937.75 4360.3,1849.7 C20.2
pads on no net: D1.2 R6.2 U1.35 U1.36 U2.4

## Polygon pours and split planes (outlines as drawn)
no net on Top Layer "NONET_L01_P002" (solid, pour order 2): 5035,1560 5030,1565 5030,3775 3855,3775 3860,3770 3860,1565
no net on Top Layer "NONET_L01_P001" (solid, pour order 1): 5030,1555 5030,3765 5035,3770 3860,3770 3860,1565
GND on Top Layer "GND_L01_P000" (solid, remove dead copper, pour order 0): 5035,1560 5035,3770 3860,3770 3860,1565
no net on Top 3D Body "NONET_L02_P005" (solid, remove dead copper, pour order 5): 5030,1555 5020,1565 3860,1565 3860,3770 5035,3770
no net on Bottom Layer "NONET_L02_P006" (solid, pour order 6): 5030,1555 5030,3765 5020,3775 3855,3775 3855,1570 3860,1565

## Keep-outs
Keep-Out Layer:
  lines w10: 3855,1565 3860,1560 5035,1560 5035,3765 5030,3770 3855,3770 3855,1565

## Other copper
Multi-Layer:
  the board outline again, w10